# Altium PCB unrouted2.0.PcbDoc
Units mil, origin at the board's own origin, x right, y up, seen from the top; angles counter-clockwise.
Board outline 1135 x 2850 mil, 2 copper layers (Top Layer, Bottom Layer); 53 components, 49 nets, 265 pads, 19 vias.
Unrouted connection lines stored in the file: 60.
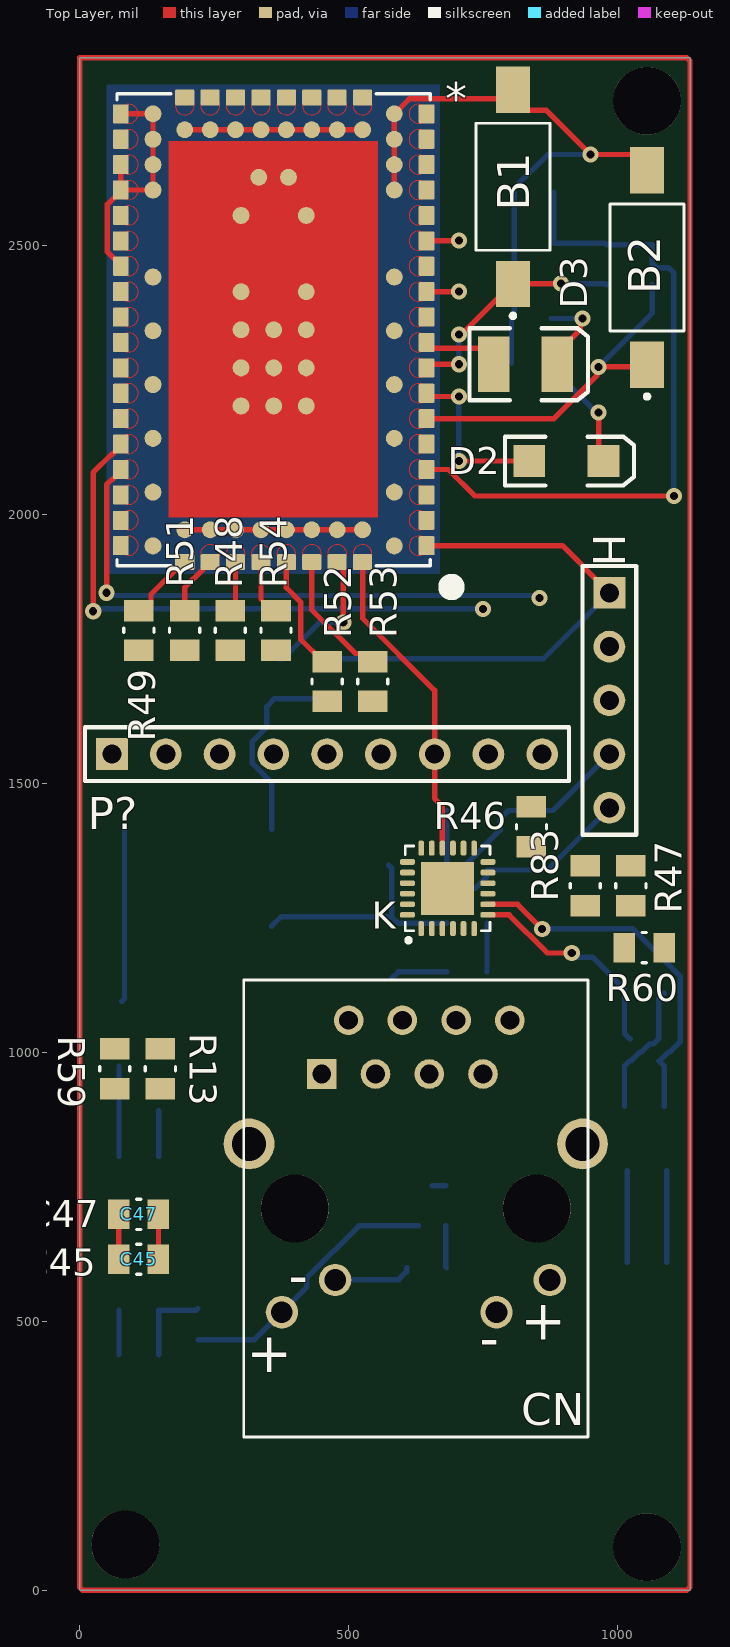
[diagram p0: Top Layer view]
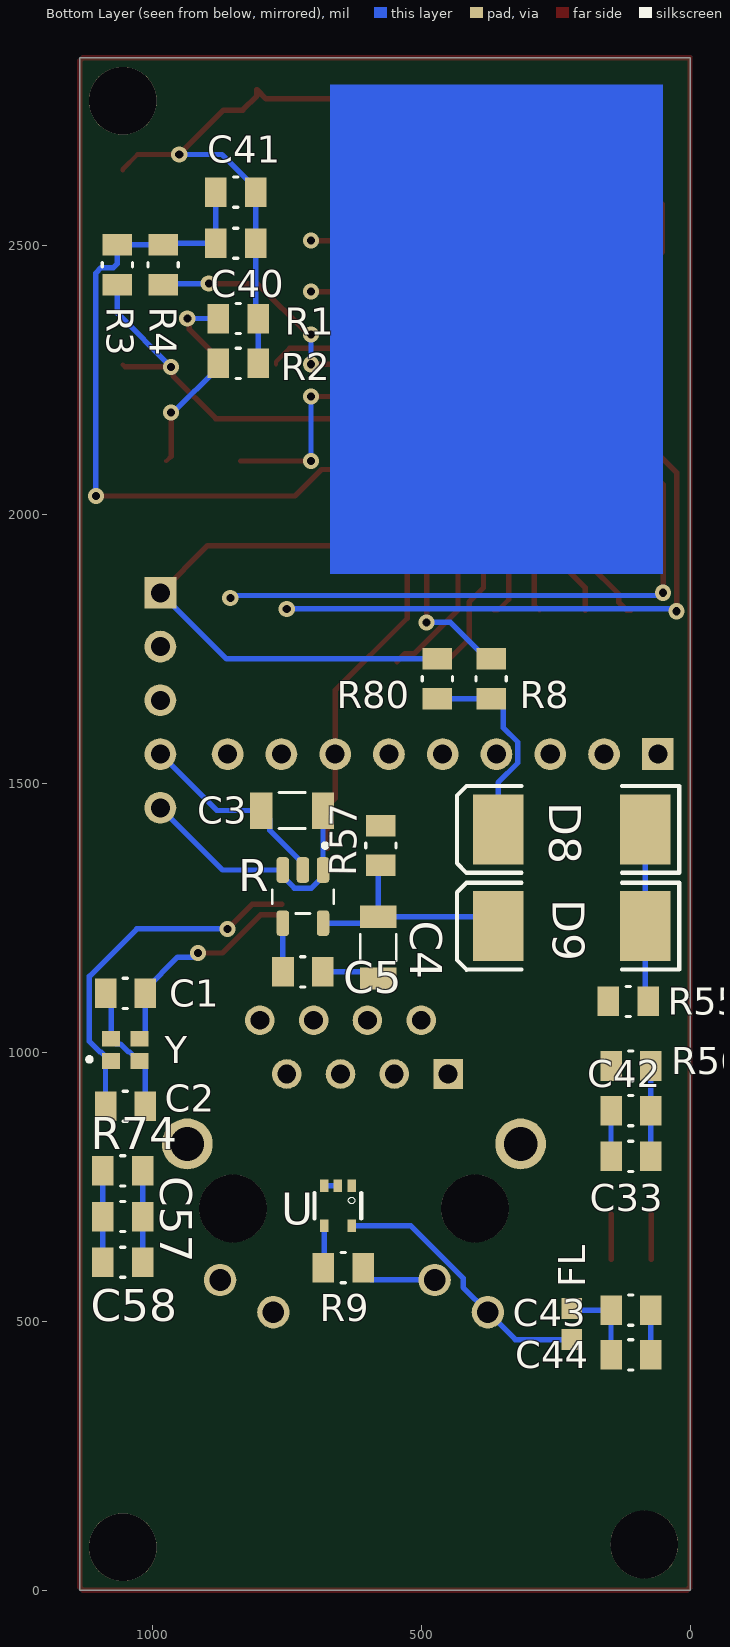
[diagram p1: Bottom Layer view, seen from below]

## Layer stack, top to bottom
Top Solder: solder mask 0.4, Solder Resist, Dk 3.5
Top Layer: signal copper 1.4
Dielectric 1: dielectric 12.6, FR-4, Dk 4.8
Bottom Layer: signal copper 1.4
Bottom Solder: solder mask 0.4, Solder Resist, Dk 3.5

## Board outline
0,2850 0,0 1135,0 1135,2850

## Design rules (kind name [scope] priority, off if disabled: settings)
Clearance [All] p1: gap=5 ignorepadtopadclearanceinfootprint=FALSE // Default=10mil
DiffPairsRouting [All] p1: maxlimit=10 minlimit=10 mostfreqgap=10 toplayer_minwidth=8 toplayer_maxwidth=15 toplayer_prefwidth=15 bottomlayer_minwidth=15 bottomlayer_maxwidth=15 bottomlayer_prefwidth=15 maxuncoupledlength=500 // DefaultMinWidth=15mil
HoleSize [All] p1: absolutevalues=TRUE maxlimit=150 minlimit=1 maxpercent=80.000 minpercent=20.000 // MaximumDefault=100mil
MinimumSolderMaskSliver [All] p1: minsoldermaskwidth=1 // Default=10mil
PolygonConnect [All] p1: connectstyle=Relief reliefconductorwidth=10 reliefentries=4 polygonreliefangle="90 Angle" airgapwidth=10
RoomDefinition Ublox_breakout [InComponentClass('Ublox_breakout')] p1: confinementstyle=ConfineIn formatcopy=TRUE lockcomponents=FALSE outline -163.49,0 2436.51,0 2436.51,2999.07 -163.49,2999.07
RoutingVias [All] p1: holewidth=28 width=50 viastyle="Through Hole" minholewidth=28 minwidth=50 maxholewidth=28 maxwidth=50
SilkToSolderMaskClearance [IsPad] p1: minsilkscreentomaskgap=4 clearancetoexposedcopper=TRUE // Default=10mil
SolderMaskExpansion [All] p1: expansion=4 istentingtop=FALSE
Width [All] p1: maxlimit=10 minlimit=5 preferedwidth=10 toplayer_prefwidth=8 minimp=50.000000 maximp=50.000000 favimp=50.000000 // MinWidthDefault=10mil
26 further rules are at their usual default settings.

## Classes and differential pairs
differential pair PHY_TX: +PHY_TX_P -PHY_TX_N
differential pair PHY_RX: +PHY_RX_P -PHY_RX_N

## Components (designator, comment, footprint, x,y, rotation, side; value= is the part's Value field where it differs from the comment)
* "ODIN-W262" ODIN-W262 360.63,2344.13 r90 top
B1 "push button" TECO-FSMSM 805.68,2610 r90 top
B2 "push button" TECO-FSMSM 1055,2460 r90 top
C1 "22uF 10V" 0805 1050,1110 r0 bottom value=22uF
C2 "22uF 10V" 0805 1050,900 r180 bottom value=22uF
C3 "10UF 25V" 1206 740,1450 r0 bottom value=10uF
C4 "10UF 25V" 1206 580,1195 r270 bottom value=10uF
C5 "10nF 50V" 0805 720,1150 r180 bottom value=10nF
C33 "2.2uF 16V" 0805 110,807 r0 bottom value=2.2uF
C40 "100nF 50V" 0805 845,2505 r0 bottom value=100nF
C41 "100nF 50V" 0805 845,2600 r0 bottom value=100nF
C42 "100nF 50V" 0805 110,892 r0 bottom value=100nF
C43 "2.2uF 16V" 0805 110,521.03 r0 bottom value=2.2uF
C44 "100nF 50V" 0805 110,437.75 r0 bottom value=100nF
C45 "100nF 50V" 0805 109.38,615.67 r0 top value=100nF
C47 "100nF 50V" 0805 109.38,698.95 r0 top value=100nF
C57 "100nF 50V" 0805 1055,695 r0 bottom value=100nF
C58 "100nF 50V" 0805 1055,610 r0 bottom value=100nF
CN "CN J00-0045NL" "RJ45 J00-0045NL" 625,710 r180 top
D2 "LED2" 3.2X1.6X1.1 905,2100 r0 top
D3 "LED3" 3.5X2.8X1.9 829.06,2280 r0 top
D8 "Diode" SMC 220,1415 r0 bottom
D9 "Diode" SMC 220,1235 r0 bottom
FL "BLM18PG300SN1D" BEADC1608X95N 220,495 r90 bottom
H "Header 5" HDR1X5 985,1855 r270 top
K "KSZ8081RNAIA-TR" QFN50P400X400X90-25N 684.21,1305.2 r90 top
P? "Header 9" HDR1X9 60,1555 r0 top
R "LP2992IM5-1.8" SOT95P280X145-5N 720,1290 r270 bottom
R1 "270" 0805 840,2365 r0 bottom
R2 "270" 0805 840,2281.72 r0 bottom
R3 "1k" 0805 1065,2465 r90 bottom
R4 "1k" 0805 980,2465 r90 bottom
R8 "JUMPER" 0805 370,1695 r90 bottom value=0
R9 "120" 0805 645,600 r0 bottom
R13 "1k" 0805 150,970 r90 top
R46 "10.0" 0805 840,1420 r90 top
R47 "10.0" 0805 1025,1310 r90 top
R48 "10.0" 0805 280,1785 r270 top
R49 "10.0" 0805 110,1785 r270 top
R51 "10.0" 0805 195,1785 r270 top
R52 "10.0" 0805 460,1690 r90 top
R53 "10.0" 0805 545,1690 r90 top
R54 "10.0" 0805 365,1785 r90 top
R55 "1k" 0805 115,1095 r0 bottom
R56 "1k" 0805 110,975 r180 bottom
R57 "1k" 0805 575,1385 r90 bottom
R59 "1k" 0805 65,970 r270 top
R60 "6.8k" 0805 1050,1195 r180 top
R74 "16m" 0805 1055,780 r180 bottom
R80 "JUMPER" 0805 470,1695 r90 bottom value=0
R83 "4.7k" 0805 940,1310 r270 top
U "NC7SZ125" SC70-5 655,715 r0 bottom
Y "ECS-250-10-37-JTN-TR" XTAL_ECS-250-10-37-JTN-TR 1050,1005 r180 bottom

## Footprints (in the part's own frame and the unit in brackets; to place one, negate y for a bottom-side part, rotate by r counter-clockwise, add the part's x,y. Pads: shape width x height; smd on the part's side, far side on the other; paste and mask are expansions set on the pad)
3.2X1.6X1.1 [mm]
  rect 1.5x1.5 smd: 1(-1.75,0) 2(1.75,0)
  silkscreen extent -2.9,-1.15 3.2,1.15
3.5X2.8X1.9 [mm] "SM LED; 2 C-Bend Leads; Body 3.5 x 2.8 x 1.9 mm, inc leads (LxWxH typ)"
  rect 1.5x2.6 smd: 1(-1.5,0) 2(1.5,0)
  silkscreen extent -2.65,-1.7 2.95,1.7
0805 [mil]
  rect 40x55 smd: 1(-37,0) 2(37,0)
  silkscreen extent -4,-28 4,28
1206 [mm]
  rect 1.05x1.72 smd: 1(-1.46,0) 2(1.46,0)
  silkscreen extent -0.62,-0.85 0.62,0.85
BEADC1608X95N [mm]
  rect 1x0.97 smd: 1(-0.735,0) 2(0.735,0)
HDR1X5 [mm] "Connector; Header; 5 Position"
  rect 1.5x1.5 hole 0.9: 1(0,0)
  round 1.5 hole 0.9: 2(2.54,0) 3(5.08,0) 4(7.62,0) 5(10.16,0)
  silkscreen extent -1.27,-1.27 11.43,1.27
HDR1X9 [mm] "Connector; Header; 9 Position"
  rect 1.5x1.5 hole 0.9: 1(0,0)
  round 1.5 hole 0.9: 2(2.54,0) 3(5.08,0) 4(7.62,0) 5(10.16,0) 6(12.7,0) 7(15.24,0) 8(17.78,0) 9(20.32,0)
  silkscreen extent -1.27,-1.27 21.59,1.27
ODIN-W262 [mm]
  round 0.8 smd: 1(6.6,-5.7) 2(7.8,-5.7) 3(9,-5.7) 4(10.2,-5.7) 5(9.45,-4.2) 6(9.45,-3) 7(9.45,-1.8) 8(9.45,-0.6) 9(9.45,0.6) 10(9.45,1.8) 11(9.45,3) 12(9.45,4.2) 13(10.2,5.7) 14(9,5.7) 15(7.8,5.7) 16(6.6,5.7) 17(-9.45,4.2) 18(-9.45,3) 19(-9.45,1.8) 20(-9.45,0.6) 21(-9.45,-0.6) 22(-9.45,-1.8) 23(-9.45,-3) 24(-9.45,-4.2) 25(-3.6,-1.54) 26(-1.8,-1.54) 27(0,-1.54) 28(1.8,-1.54) 29(5.4,-1.54) 30(7.2,-0.7) 31(-3.6,0) 32(-1.8,0) 33(0,0) 34(-3.6,1.54) 35(-1.8,1.54) 36(0,1.54) 37(1.8,1.54) 38(5.4,1.54) 39(7.2,0.7) TP1(2.49,-5.7) TP2(2.49,5.7) TP3(-0.05,-5.7) TP4(-0.05,5.7) TP5(-2.59,-5.7) TP6(-2.59,5.7) TP7(-5.13,-5.7) TP8(-5.13,5.7) TP9(-7.67,-5.7) TP10(-7.67,5.7) TP11(-10.21,-5.7) TP12(-10.21,5.7)
  rrect15% 0.9x0.75 smd paste-1 mask+0: A1(-10.2,-7.225) A2(-9,-7.225) A3(-7.8,-7.225) A4(-6.6,-7.225) A5(-5.4,-7.225) A6(-4.2,-7.225) A7(-3,-7.225) A8(-1.8,-7.225) A9(-0.6,-7.225) A10(0.6,-7.225) A11(1.8,-7.225) A12(3,-7.225) A13(4.2,-7.225) A14(5.4,-7.225) A15(6.6,-7.225) A16(7.8,-7.225) A17(9,-7.225) A18(10.2,-7.225) C1(10.2,7.225) C2(9,7.225) C3(7.8,7.225) C4(6.6,7.225) C5(5.4,7.225) C6(4.2,7.225) C7(3,7.225) C8(1.8,7.225) C9(0.6,7.225) C10(-0.6,7.225) C11(-1.8,7.225) C12(-3,7.225) C13(-4.2,7.225) C14(-5.4,7.225) C15(-6.6,7.225) C16(-7.8,7.225) C17(-9,7.225) C18(-10.2,7.225)
  rrect15% 0.75x0.9 smd paste-1 mask+0: B1(10.975,-4.2) B2(10.975,-3) B3(10.975,-1.8) B4(10.975,-0.6) B5(10.975,0.6) B6(10.975,1.8) B7(10.975,3) B8(10.975,4.2) D1(-10.975,4.2) D2(-10.975,3) D3(-10.975,1.8) D4(-10.975,0.6) D5(-10.975,-0.6) D6(-10.975,-1.8) D7(-10.975,-3) D8(-10.975,-4.2)
  Top Layer circle w0: c10.2,6.85 r0.45
  Top Layer circle w0: c-6.6,-6.85 r0.45
  Top Layer circle w0: c10.6,4.2 r0.45
  Top Layer circle w0: c10.6,3 r0.45
  Top Layer circle w0: c10.6,1.8 r0.45
  Top Layer circle w0: c10.6,0.6 r0.45
  Top Layer circle w0: c10.6,-0.6 r0.45
  Top Layer circle w0: c10.6,-1.8 r0.45
  Top Layer circle w0: c10.6,-3 r0.45
  Top Layer circle w0: c10.6,-4.2 r0.45
  Top Layer circle w0: c4.2,6.85 r0.45
  Top Layer circle w0: c5.4,6.85 r0.45
  Top Layer circle w0: c9,6.85 r0.45
  Top Layer circle w0: c-10.2,6.85 r0.45
  Top Layer circle w0: c-9,6.85 r0.45
  Top Layer circle w0: c-7.8,6.85 r0.45
  Top Layer circle w0: c-4.2,6.85 r0.45
  Top Layer circle w0: c-3,6.85 r0.45
  Top Layer circle w0: c-1.8,6.85 r0.45
  Top Layer circle w0: c-0.6,6.85 r0.45
  Top Layer circle w0: c0.6,6.85 r0.45
  Top Layer circle w0: c1.8,6.85 r0.45
  Top Layer circle w0: c-5.4,-6.85 r0.45
  Top Layer circle w0: c-9,-6.85 r0.45
  Top Layer circle w0: c10.2,-6.85 r0.45
  Top Layer circle w0: c9,-6.85 r0.45
  Top Layer circle w0: c7.8,-6.85 r0.45
  Top Layer circle w0: c6.6,-6.85 r0.45
  Top Layer circle w0: c5.4,-6.85 r0.45
  Top Layer circle w0: c3,-6.85 r0.45
  Top Layer lines w0: -5.414,7.3 ccw(c-5.4,6.85) -5.486,7.292 ccw(c-5.4,6.85) -5.531,7.281 ccw(c-5.4,6.85) -5.667,6.488 ccw(c-5.4,6.85) -5.4,6.4 ccw(c-5.4,6.85) -5.414,7.3 ; 2.968,7.299 cw(c3,6.85) 3.07,7.295 cw(c3,6.85) 3.131,7.281 cw(c3,6.85) 3,6.4 cw(c3,6.85) 2.968,7.299 ; 6.53,7.295 cw(c6.6,6.85) 6.849,7.225 cw(c6.6,6.85) 6.6,6.4 cw(c6.6,6.85) 6.49,7.286 cw(c6.6,6.85) 6.53,7.295 ; -6.731,7.281 cw(c-6.6,6.85) -6.6,6.4 cw(c-6.6,6.85) -6.731,7.281 ; 7.669,7.281 ccw(c7.8,6.85) 7.551,7.225 ccw(c7.8,6.85) 7.8,6.4 ccw(c7.8,6.85) 7.669,7.281 ; -11.031,4.331 cw(c-10.6,4.2) -10.6,3.75 cw(c-10.6,4.2) -11.045,4.13 cw(c-10.6,4.2) -11.05,4.2 cw(c-10.6,4.2) -11.05,4.207 cw(c-10.6,4.2) -11.047,4.251 cw(c-10.6,4.2) -11.042,4.286 cw(c-10.6,4.2) -11.031,4.331 ; -11.031,3.131 cw(c-10.6,3) -10.6,2.55 cw(c-10.6,3) -11.05,3 cw(c-10.6,3) -11.045,3.07 cw(c-10.6,3) -11.031,3.131 ; -11.05,1.8 cw(c-10.6,1.8) -10.6,1.35 cw(c-10.6,1.8) -11.05,1.8 ; -11.047,0.651 ccw(c-10.6,0.6) -11.05,0.6 ccw(c-10.6,0.6) -10.6,0.15 ccw(c-10.6,0.6) -11.047,0.651 ; -11.05,-0.6 cw(c-10.6,-0.6) -10.6,-1.05 cw(c-10.6,-0.6) -11.05,-0.619 cw(c-10.6,-0.6) -11.05,-0.6 ; -11.048,-1.762 ccw(c-10.6,-1.8) -11.05,-1.8 ccw(c-10.6,-1.8) -11.035,-1.917 ccw(c-10.6,-1.8) -11.031,-1.931 ccw(c-10.6,-1.8) -10.6,-2.25 ccw(c-10.6,-1.8) -11.048,-1.762 ; -11.031,-2.869 ccw(c-10.6,-3) -11.05,-3 ccw(c-10.6,-3) -11.049,-3.032 ccw(c-10.6,-3) -11.043,-3.08 ccw(c-10.6,-3) -11.042,-3.086 ccw(c-10.6,-3) -11.034,-3.118 ccw(c-10.6,-3) -11.031,-3.131 ccw(c-10.6,-3) -10.6,-3.45 ccw(c-10.6,-3) -11.031,-2.869 ; -11.05,-4.2 cw(c-10.6,-4.2) -10.6,-4.65 cw(c-10.6,-4.2) -10.975,-4.449 cw(c-10.6,-4.2) -11.031,-4.331 cw(c-10.6,-4.2) -11.05,-4.2 ; 0.6,-6.4 cw(c0.6,-6.85) 0.6,-7.3 cw(c0.6,-6.85) 0.6,-6.4 ; -8.067,-6.488 ccw(c-7.8,-6.85) -8.098,-6.513 ccw(c-7.8,-6.85) -7.8,-7.3 ccw(c-7.8,-6.85) -8.067,-6.488 ; -10.069,-7.281 ccw(c-10.2,-6.85) -10.27,-7.295 ccw(c-10.2,-6.85) -10.2,-7.3 ccw(c-10.2,-6.85) -10.114,-7.292 ccw(c-10.2,-6.85) -10.069,-7.281 ; -3.131,-7.281 ccw(c-3,-6.85) -3.07,-7.295 ccw(c-3,-6.85) -3,-7.3 ccw(c-3,-6.85) -3.131,-7.281 ; -0.514,-7.292 cw(c-0.6,-6.85) -0.6,-7.3 cw(c-0.6,-6.85) -0.67,-7.295 cw(c-0.6,-6.85) -0.514,-7.292 ; -1.87,-7.295 cw(c-1.8,-6.85) -1.73,-7.295 cw(c-1.8,-6.85) -1.8,-7.3 cw(c-1.8,-6.85) -1.87,-7.295 ; 1.87,-7.295 ccw(c1.8,-6.85) 1.8,-7.3 ccw(c1.8,-6.85) 1.849,-7.297 ccw(c1.8,-6.85) 1.87,-7.295 ; -4.169,-7.299 cw(c-4.2,-6.85) -4.2,-7.3 cw(c-4.2,-6.85) -4.169,-7.299 ; 4.213,-7.3 ccw(c4.2,-6.85) 4.2,-7.3 ccw(c4.2,-6.85) 4.213,-7.3
  silkscreen extent -12.4,-8.65 11.15,7.4, body extent -11.15,-7.4 11.15,7.4, height 4.8
QFN50P400X400X90-25N [mm]
  rrect70% 0.71x0.27 smd: 1(-1.9,1.25) 2(-1.9,0.75) 3(-1.9,0.25) 4(-1.9,-0.25) 5(-1.9,-0.75) 6(-1.9,-1.25) 13(1.9,-1.25) 14(1.9,-0.75) 15(1.9,-0.25) 16(1.9,0.25) 17(1.9,0.75) 18(1.9,1.25)
  rrect70% 0.27x0.71 smd: 7(-1.25,-1.9) 8(-0.75,-1.9) 9(-0.25,-1.9) 10(0.25,-1.9) 11(0.75,-1.9) 12(1.25,-1.9) 19(1.25,1.9) 20(0.75,1.9) 21(0.25,1.9) 22(-0.25,1.9) 23(-0.75,1.9) 24(-1.25,1.9)
  rect 2.5x2.5 smd paste-2: 25(0,0)
  silkscreen extent -2.55,-2 2,2
"RJ45 J00-0045NL" [mm]
  rect 1.398x1.398 hole 0.89: 1(4.445,-6.35)
  round 1.398 hole 0.89: 2(3.175,-8.89) 3(1.905,-6.35) 4(0.635,-8.89) 5(-0.635,-6.35) 6(-1.905,-8.89) 7(-3.175,-6.35) 8(-4.445,-8.89)
  round 1.53 hole 1.02: 9(6.325,4.9) 10(3.81,3.38) 11(-3.81,4.9) 12(-6.325,3.38)
  round 3.2 hole 3.2 unplated: None(-5.715,0) None(5.715,0)
  round 2.4 hole 1.6: S1(-7.875,-3.05) S2(7.875,-3.05)
  silkscreen extent -8.13,-10.8 8.13,10.8
SC70-5 [mm]
  rect 0.4x0.6 smd: 1(-0.65,-0.95) 2(0,-0.95) 3(0.65,-0.95) 4(0.65,0.95) 5(-0.65,0.95)
  silkscreen extent -1.1,-0.6 1.1,0.6
SMC [mm] "DO-214-AB/SMC; 2 C-Bend Leads; Body 7.9 x 5.9 mm, inc. leads (LxW)"
  rect 2.4x3.3 smd: 1(-3.475,0) 2(3.475,0)
  silkscreen extent -5.07,-2.05 5.43,2.05
SOT95P280X145-5N [mm]
  rrect50% 1.21x0.59 smd: 1(-1.255,0.95) 2(-1.255,0) 3(-1.255,-0.95) 4(1.255,-0.95) 5(1.255,0.95)
  silkscreen extent -2.51,-1.45 0.8,1.45
TECO-FSMSM [mm]
  rect 2.19x1.6 smd: 1(-4.59,0) 2(4.59,0)
  silkscreen extent -6.2,-1.75 3,1.75
XTAL_ECS-250-10-37-JTN-TR [mm]
  rect 0.85x0.75 smd: 1(-0.675,-0.525) 2(0.675,-0.525) 3(0.675,0.525) 4(-0.675,0.525)
  silkscreen extent -1.8,-0.55 -1.6,-0.35

## Part data
B1 B2: library part Teco-FSMSM
C1 C2: library part "CAP 22uF 10V", "CAP CER 2.2UF 10V X5R 0805", Operating Temperature="-55°C ~ 85°C", Package=0805, Rating=10V, Temperature Coefficient=X5R, Tolerance=20%
C3 C4: library part "CAP 10uF 25V", "CAP CER 10UF 25V X5R 1206", Operating Temperature="-55°C ~ 85°C", Package=1206, Rating=25V, Temperature Coefficient=X5R, Tolerance=10%
C5: library part "CAP 10nF 50V", "CAP CER 10000PF 50V X7R 0805", Operating Temperature="-55°C ~ 125°C", Package=0805, Rating=50V, Temperature Coefficient=X7R, Tolerance=10%
C33 C43: library part "CAP 2.2uF 16V", "CAP CER 2.2UF 16V X7R 0805", Operating Temperature="-55°C ~ 125°C", Package=0805, Rating=16V, Temperature Coefficient=X7R, Tolerance=10%
C40 C41 C42 C44 C45 C47 C57 C58: library part "CAP 100nF 50V", "CAP CER 0.1UF 50V X7R 0805", Package=0805, Rating=50V, Tolerance=10%
CN: library part "CN MAGJACK", "CN MAGJACK 1PORT 100 BASE-TX", Package=None, Supplier Part Number 1=673-J00-0045NL, Digikey=553-1619-5-ND, Digikey Link=https://www.digikey.com/product-detail/en/pulse-electronics-network/J00-0045NL/553-1619-5-ND/1036860?utm_source=snapeda&utm_medium=aggregator&utm_campaign=symbol, MF="Pulse Electronics", MP=J00-0045NL, SnapEDA_Link=https://www.snapeda.com/parts/J00-0045NL/Pulse%20Electronics%20Network/view-part/87956/?ref=snap, Supplier 1=Mouser
D2: library part "LED RED SMD", "Typical RED, GREEN, YELLOW, AMBER GaAs LED", Color=Red, Current - Test=20mA, Lens Color=Colorless, Package=1206, Voltage - Forward (Vf) (Typ)=1.7V, Lens Transparency=Clear
D3: "Typical BLUE SiC LED", DatasheetVersion=16-Apr-2002, LatestRevisionDate=17-Dec-2003, LatestRevisionNote="PCB Footprint replaced.", PackageDescription="SM LED; 2 C-Bend Leads; Body 3.5 x 2.8 x 1.9 mm, inc leads (LxWxH typ)", PackageReference=3.5X2.8X1.9, PackageVersion=16-Apr-2002, Published=8-Jun-2000, Publisher="Altium Limited"
D8 D9: "Default Diode", Code_JEDEC=DO-214-AB, LatestRevisionDate=17-Jul-2002, LatestRevisionNote="Re-released for DXP Platform.", PackageDescription="DO-214-AB/SMC; 2 C-Bend Leads; Body 7.9 x 5.9 mm, inc. leads (LxW)", PackageReference=SMC, PackageVersion=Sep-1996, Published=8-Jun-2000, Publisher="Altium Limited"
FL: "30 Ohms @ 100MHz 1 Power Line Ferrite Bead 0603 _1608 Metric_ 1A 50mOhm", Package="1608 Murata", Availability=Unavailable, MF=Murata, MP=BLM18PG300SN1D, Price=None, SnapEDA_Link=https://www.snapeda.com/parts/BLM18PG300SN1D/Murata/view-part/270173/?ref=snap
H: "Header, 5-Pin", LatestRevisionDate=17-Jul-2002, LatestRevisionNote="Re-released for DXP Platform.", Publisher="Altium Limited"
K: "1/1 Transceiver Full RMII 24-QFN _4x4_", Package="QFN-24 Microchip", Availability=Unavailable, MF=Microchip, MP=KSZ8081RNAIA-TR, Price=None, SnapEDA_Link=https://www.snapeda.com/parts/KSZ8081RNAIA-TR/Microchip/view-part/482545/?ref=snap
P?: "Header, 9-Pin", LatestRevisionDate=17-Jul-2002, LatestRevisionNote="Re-released for DXP Platform.", Publisher="Altium Limited"
R: Package=None, Availability=Unavailable, MP=LP2992IM5-1.8/NOPB, Price=None
R1 R2: library part "RES 270 1/8W", "RES SMD 270 OHM 5% 1/8W 0805", Package=0805, Power (Watts)=0.125W, Tolerance=5%
R3 R4 R13 R55 R56 R57 R59: library part "RES 1k 1/8W", "RES SMD 1K OHM 5% 1/8W 0805", Package=0805, Power (Watts)=0.125W, Tolerance=5%
R8 R80: library part "RES 0 JUMPER", "RES SMD 0 OHM JUMPER GENERIC 0805", Package=0805
R9: library part "RES 120.0 1/8W", "RES SMD 120 OHM 5% 1/8W 0805", Package=0805, Power (Watts)=0.125W, Tolerance=5%
R46 R47 R48 R49 R51 R52 R53 R54: library part "RES 10.0 1/8W - 5%", "RES SMD 10.0 OHM 5% 1/8W 0805", Package=0805, Power (Watts)=0.125W, Tolerance=5%
R60: library part "RES 6.8k 1/8W", "RES SMD 6.8K OHM 5% 1/8W 0805", Package=0805, Power (Watts)=0.125W, Tolerance=5%
R74: library part "RES 16m 1/2W", "RES SMD 0.016 OHM 1% 1/2W 0805 Thick Film", Case Code (Imperial)=0805, Case Code (Metric)=2012, Manufacturer=Panasonic, Manufacturer Part Number=ERJ-6BWFR016V, Max Operating Temperature=155°C, Max Power Dissipation=500mW, Min Operating Temperature=-55°C, Package Quantity=1, Resistance=16mR, Supplier Part Number 1=P.016AQCT-ND, Temperature Coefficient=200ppm/°C, Tolerance=1%, Case/Package=0805, Category="Chip SMD Resistors", ComponentLink1Description=https://datasheet.ciiva.com/11808/0900766b8126441d-11808690.pdf?src-supplier=RSComponents, ComponentLink1URL=https://datasheet.ciiva.com/11808/0900766b8126441d-11808690.pdf?src-supplier=RSComponents, ComponentLink2Description=https://datasheet.ciiva.com/2452/aoa0000ce3-2452594.pdf?src-supplier=Digi-Key, ComponentLink2URL=https://datasheet.ciiva.com/2452/aoa0000ce3-2452594.pdf?src-supplier=Digi-Key, ComponentLink3Description=https://datasheet.ciiva.com/2452/aoa0000ce3-2452592.pdf?src-supplier=Digi-Key, ComponentLink3URL=https://datasheet.ciiva.com/2452/aoa0000ce3-2452592.pdf?src-supplier=Digi-Key, ComponentLink4Description=https://datasheet.ciiva.com/2452/aoa0000ce3-2452593.pdf?src-supplier=Digi-Key, ComponentLink4URL=https://datasheet.ciiva.com/2452/aoa0000ce3-2452593.pdf?src-supplier=Digi-Key, ComponentLink5Description=https://datasheet.ciiva.com/9192/aoa0000ce3-9192761.pdf?src-supplier=Avnet, ComponentLink5URL=https://datasheet.ciiva.com/9192/aoa0000ce3-9192761.pdf?src-supplier=Avnet, ComponentLink6Description=https://datasheet.ciiva.com/17211/aoa0000ce3-17211370.pdf?src-supplier=Avnet+Europe, ComponentLink6URL=https://datasheet.ciiva.com/17211/aoa0000ce3-17211370.pdf?src-supplier=Avnet+Europe, Composition="Thick Film", Contact Plating=Tin, Depth=1.25mm, Features="Automotive AEC-Q200", Height=0.028inch, Lead Free="Lead Free", Length=2mm, Military Standard=Not, Mount="Surface Mount", Number of Pins=2, Number of Terminations=2, Packaging="Tape and Reel", Power Rating=500mW, Pricing 1="1=0.65000, 10=0.53800, 100=0.36140, 1000=0.21148, 2500=0.20917 (USD)", Radiation Hardening=No, RoHS=Yes, Stock 1=4585, Supplier 1=Digi-Key, Termination=SMD/SMT, Width=0.049inch
R83: library part "RES 4.7k 1/8W - 5%", "RES SMD 4.7k OHM 5% 1/8W 0805", Package=0805, Power (Watts)=0.125W, Tolerance=5%
U: "Buffer, Non-Inverting 1 Element 1 Bit per Element 3-State Output SC-70-5", Package="SC-70 ON Semiconductor", Availability=Unavailable, MF="ON Semiconductor", MP=NC7SZ125, Price=None, SnapEDA_Link=https://www.snapeda.com/parts/NC7SZ125/ON%20Semiconductor/view-part/2686816/?ref=snap
Y: "SMD Crystal 2.0 x 1.6 x 0.45 mm ceramic package", Package=None, Availability=Unavailable, MP=ECS-250-10-37-JTN-TR, Price=None

## Free pads (board coordinates)
  round 125.98 hole 125.98 unplated: 6(85,85) 6(1055,80) 6(1055,2770)

## Via types
v1: diameter 30, hole 15, Top Layer to Bottom Layer, 19 vias

## Nets (pads, with @x,y where several pads share a name; then routed paths per layer and width w, separated by ;. In a path a pad name is that pad's centre, name@x,y a point inside that pad or via, vN(x,y) a via of type N, cw(c..) or ccw(c..) an arc to the next point about the centre after c; other vN are vias at no path point)
1v8: C4.1 D9.2 R13.2 R55.2 R57.1 R59.1 R83.1 R.5 | length 435.5
  Bottom Layer w10: D9.2 374.29,1252.48 C4.1 ; R57.1 580,1343 C4.1 ; R.5 591.89,1240.59 C4.1
3v3: *.A4 C3.1 C40.2 C41.2 CN.4 CN.5 CN.9 FL.1 H.5 R3.2 R4.2 R.1 R.3 U.5 | length 2267
  Top Layer w10: *.A4 648.03,2084.29 685.35,2084.29 734.64,2035 v1(1105,2035)
  Bottom Layer w10: FL.1 324.96,466.06 CN.9 421.99,563.09 421.99,580.65 518.93,677.6 U.5 ; C3.1 682.6,1449.92 R.1 682.6,1327.2 704.21,1305.59 735.79,1305.59 757.4,1327.2 R.3 869.41,1339.41 H.5 ; C41.2 C40.2 977,2505 R4.2 R3.2 1065,2467 1072.43,2459.57 1095.07,2459.57 1105,2449.64 v1(1105,2035)
BlueLED: *.A9 D3.1 | length 143.4
  Top Layer w8: *.A9 647.71,2320.51 647.82,2320.51 *.A9@648.03,2320.51 ; *.A9@647.82,2317.77 *.A9@655.59,2310 ; D3.1@744.47,2310 770,2284.47 D3.1
  Top Layer w10: *.A9@655.59,2310 D3.1@744.47,2310
BYPASS: C5.1 R.4 | length 90.8
  Bottom Layer w10: C5.1 757.4,1150.4 R.4
CRS_DV: K.15 R54.1
Diode_2: D2.2 R2.2 | length 224.1
  Top Layer w8: D2.2@965,2108.9 D2.2
  Top Layer w10: D2.2@965,2108.9 v1(965,2190)
  Bottom Layer w10: R2.2 877,2274.22 961.22,2190 v1(965,2190)
Diode_3: D3.2 R1.2 | length 162.4
  Top Layer w10: D3.2 888.11,2301.65 931.17,2344.72 931.17,2361.17 v1(935,2365)
  Bottom Layer w10: R1.2 v1(935,2365)
ETH_CRSDV: *.D4 P?.4 R54.2 R57.2 | length 106
  Top Layer w8: 337.01,1842.49 357.5,1822 R54.2 ; *.D4@337.01,1909.09 *.D4
  Top Layer w10: 337.01,1842.49 *.D4@337.01,1909.09
ETH_MC: K.10 P?.9 R47.1 R83.2
ETH_MDIO: K.11 P?.8
ETH_REFCLK: *.D8 K.16 P?.7 | length 593.5
  Top Layer w10: *.D8 525.98,1909.09 525.98,1807.66 660,1673.64 P?.7 660,1472.38 674.37,1458.01 K.16
ETH_RXD0: *.D5 P?.5 R52.2 | length 220.8
  Top Layer w10: *.D5 384.25,1909.09 384.25,1864.39 410.88,1837.77 410.88,1768.62 452.5,1727 R52.2
ETH_RXD1: *.D6 P?.6 R53.2 | length 242.2
  Top Layer w10: *.D6 431.5,1909.09 431.5,1823.15 512.64,1742 530,1742 R53.2
ETH_TXD0: *.D1 P?.1 R49.1 | length 131.5
  Top Layer w10: R49.1 117.5,1822 132.5,1837 132.5,1852.22 190.13,1909.86 192.32,1912.05 *.D1
ETH_TXD1: *.D2 P?.2 R51.1 | length 111.5
  Top Layer w10: R51.1 195,1864.53 229.8,1899.33 229.8,1902.28 237.38,1909.86 239.57,1912.05 *.D2
ETH_TXEN: *.D3 P?.3 R48.1 | length 94.1
  Top Layer w8: R48.1 R48.1@289.76,1831.76 ; *.D3@289.76,1909.09 *.D3
  Top Layer w10: R48.1@289.76,1831.76 *.D3@289.76,1909.09
GND: *.1 *.2 *.3 *.4 *.5 *.6 *.7 *.8 *.9 *.10 *.11 *.12 *.13 *.14 *.15 *.16 *.17 *.18 *.19 *.20 *.21 *.22 *.23 *.24 *.25 *.26 *.27 *.28 *.29 *.30 *.31 *.32 *.33 *.34 *.35 *.36 *.37 *.38 *.39 *.A3 *.A10 *.C1 *.C3 *.C4 *.C7 B1.2 B2.2 C1.2 C2.2 C3.2 C4.2 C5.2 C33.1 C40.1 C41.1 C42.1 C43.1 C44.1 C45.1 C47.1 C57.2 C58.2 H.4 K.22 K.25 R1.1 R2.1 R56.2 R60.1 R74.1 R.2 U.2 U.3 Y.2 Y.4 | length 3558.4
  Top Layer w8: B2.2@1027.5,2670 1055,2642.5 B2.2
  Top Layer w10: C45.1 C47.1 ; *.C4@73.77,2599.64 51.42,2577.29 51.42,2488.93 65.38,2474.96 66.42,2474.96 *.C7@73.99,2467.39 ; *.C4 108.66,2603.98 *.16 *.15 *.14 *.13 108.66,2745.71 *.C1 ; *.C4@76.18,2613.77 *.C3@76.18,2641.43 ; *.17 *.18 *.19 *.20 *.21 *.22 *.23 *.24 ; *.12 *.11 *.10 *.9 *.8 *.7 *.6 *.5 ; *.1 *.2 *.3 *.4 612.76,2773.43 788.4,2773.43 B1.2 805.68,2779.09 832.18,2752.6 867.4,2752.6 v1(950,2670) B2.2@1027.5,2670
  Bottom Layer w10: C44.1 C43.1 ; C33.1 C42.1 R56.2 ; C4.2 592.48,1150 C5.2 ; U.2 U.3 ; R.2 720,1351.61 781.81,1413.43 781.81,1434.33 C3.2 880,1450 H.4 ; R2.1 R1.1 808,2370 C40.1 C41.1 808,2607.5 870.5,2670 v1(950,2670) ; C2.2 1013,974.57 1022.76,984.33 Y.2 1025.39,984.33 1041.97,1000.91 1044.3,1000.91 1059.3,1015.91 1066.81,1015.91 Y.4 1076.57,1099.57 C1.2 ; C58.2 C57.2 R74.1
INTRP: K.18 R13.1
INV_TO_RJ45: CN.10 R9.1 | length 146.9
  Bottom Layer w10: CN.10 475.57,577.5 593,577.5 608,592.5 R9.1
JUMPERS: D8.2 R8.1 R80.1 | length 383
  Bottom Layer w10: D8.2 356.81,1502.29 320.47,1538.63 320.47,1577.3 347.5,1604.33 347.5,1643 362.5,1658 R8.1 R80.1
KSZ_RST_OUT: D8.1 D9.1 K.24 R55.1 | length 322.1
  Bottom Layer w10: R55.1 83.19,1100.19 D9.1 D8.1
MAIN_RESET: *.A1 H.1 R80.2 | length 942.1
  Top Layer w10: *.A1 648.03,1942.56 897.44,1942.56 H.1
  Bottom Layer w10: R80.2 862,1732 H.1
NetR9_2: R9.2 U.4 | length 78.2
  Bottom Layer w10: U.4 680.59,601.41 R9.2
PHY_LED0: K.23 R59.2 U.1
PHY_RX_N: CN.6 K.3
PHY_RX_P: CN.3 K.4
PHY_TX_N: CN.2 K.5
PHY_TX_P: CN.1 K.6
RedLED: *.A7 D2.1 | length 313.5
  Top Layer w8: *.A7 647.82,2223.28 *.A7@651.1,2220
  Top Layer w10: *.A7@651.1,2220 v1(705,2220) ; v1(705,2100) D2.1
  Bottom Layer w10: v1(705,2100) v1(705,2220)
REXT: K.9 R60.2
RJ_45_GND: C57.1 C58.1 CN.8 R74.2 | length 170
  Bottom Layer w10: C58.1 C57.1 R74.2
RMII_MDC: *.C15 R47.2 | length 1049.9
  Top Layer w10: v1(50,1855) 50,2056.19 58.57,2064.76 59.61,2064.76 73.99,2079.15 76.18,2081.34 *.C15
  Bottom Layer w10: v1(50,1855) 55,1850 850,1850 v1(855,1845)
RMII_MDIO: *.C14 R46.2 | length 1063.8
  Top Layer w8: v1@25,1816.37 v1(25,1820.68)
  Top Layer w10: v1(25,1820.68) 25,2078.44 58.57,2112.01 59.61,2112.01 73.99,2126.39 76.18,2128.58 *.C14
  Bottom Layer w10: v1(25,1820.68) 29.32,1825 v1(750,1825)
RST_D7: *.D7 R8.2 | length 265.2
  Top Layer w8: *.D7 479.24,1912.05 481.9,1909.38 *.D7@490,1901.28
  Top Layer w10: v1(490,1800) *.D7@490,1901.28
  Bottom Layer w10: R8.2 377.5,1732 445.5,1800 v1(490,1800)
RXD0: K.13 R52.1
RXD1: K.12 R53.1
RXER: K.17 R56.1
SWITCH0: *.A6 B2.1 R3.1 | length 653.6
  Top Layer w8: B2.1@1050.71,2275 B2.1
  Top Layer w10: *.A6 648.03,2178.78 881.74,2178.78 961.17,2258.21 961.17,2271.17 v1(965,2275) B2.1@1050.71,2275
  Bottom Layer w10: v1(965,2275) 1065,2375 R3.1
SWITCH1: *.A8 B1.1 R4.1 | length 433.5
  Top Layer w8: *.A8 647.82,2276.01 *.A8@651.81,2280 ; v1(705,2335) v1@709.97,2335 ; B1.1@804.97,2430 B1.1 B1.1@806.39,2430
  Top Layer w10: *.A8@651.81,2280 v1(705,2280) ; v1@709.97,2335 B1.1@804.97,2430 ; B1.1@806.39,2430 v1(895,2430)
  Bottom Layer w10: v1(705,2280) v1(705,2335) ; v1(895,2430) 978,2430 R4.1
TXD0: K.20 R49.2
TXD1: K.21 R51.2
TXEN: K.19 R48.2
UART_RXD: *.A13 H.2 | length 60.1
  Top Layer w8: *.A13 645.59,2510 *.A13@648.02,2510
  Top Layer w10: *.A13@648.02,2510 v1(705,2510)
UART_TXD: *.A11 H.3 | length 64.1
  Top Layer w8: *.A11 647.82,2417.74 650.08,2420 *.A11@655.08,2415
  Top Layer w10: *.A11@655.08,2415 v1(705,2415)
VDD_1v2: C45.2 C47.2 K.1 | length 83.3
  Top Layer w10: C45.2 C47.2
VDDA_3.3: C43.2 C44.2 FL.2 K.2 | length 157.5
  Bottom Layer w10: C44.2 C43.2 217.09,521.03 FL.2
VDDIO: C33.2 C42.2 K.14 | length 85
  Bottom Layer w10: C33.2 C42.2
X0: C1.1 K.7 Y.3 | length 408.7
  Top Layer w8: K.7 K.7@759.51,1255.49
  Top Layer w10: K.7 798.66,1255.98 869.64,1185 914.69,1185 v1@915,1185.31
  Bottom Layer w10: v1(915,1185) 922.65,1177.35 953.15,1177.35 1013,1117.5 C1.1 1013,1035.43 1022.76,1025.67 Y.3
X1: C2.1 K.8 Y.1 | length 678.4
  Top Layer w10: K.8 814.33,1275.67 v1(860,1230)
  Bottom Layer w10: v1(860,1230) 1028.64,1230 1117,1141.64 1117,1020.46 1097.45,1000.91 1095.12,1000.91 1078.54,984.33 Y.1@1077.24,984.33 ; Y.1 Y.1@1077.24,984.33 ; C2.1 1087,974.57 Y.1@1077.24,984.33
pads on no net: *.A2 *.A5 *.A12 *.A14 *.A15 *.A16 *.A17 *.A18 *.B1 *.B2 *.B3 *.B4 *.B5 *.B6 *.B7 *.B8 *.C2 *.C5 *.C6 *.C8 *.C9 *.C10 *.C11 *.C12 *.C13 *.C16 *.C17 *.C18 *.TP1 *.TP2 *.TP3 *.TP4 *.TP5 *.TP6 *.TP7 *.TP8 *.TP9 *.TP10 *.TP11 *.TP12 CN.7 CN.11 CN.12 CN.None CN.S1 CN.S2 R46.1
copper on no net: | length 7959.7
  Top Layer w10: 0,5.86 0,2850 1129.14,2850 1135,2844.14 1135,5.86 1129.14,0 5.86,0 0,5.86

## Other copper
Top Layer:
  rectangle net GND: 165,1995 555,2695
Bottom Layer:
  rectangle net GND: 50,1890 670,2800
  region: 50,1765
  region: 50,1765

## Text inside footprints (layer, text, board x,y; h text height)
CN: Top Overlay "+" at 905,530 h73.82 r180; Top Overlay "-" at 780.38,489.28 h73.82 r180; Top Overlay "-" at 425,605 h73.82 r180; Top Overlay "+" at 395,470 h73.82 r180; Mechanical 4 "12" at 930.23,654.79 h73.82 r180; Mechanical 4 "11" at 795.37,599.58 h73.82 r180; Mechanical 4 "10" at 514.61,664.65 h73.82 r180; Mechanical 4 "9" at 379.53,599.61 h73.82 r180; Mechanical 4 "FRONT" at 687.68,456.61 h73.82 r180; Mechanical 4 "RIGHT" at 913.46,331.05 h73.82 r180; Mechanical 4 "LEFT" at 424.12,330.64 h73.82 r180; Mechanical 4 "2" at 474.48,1045.98 h73.82 r180; Mechanical 4 "4" at 574.88,1045.6 h73.82 r180; Mechanical 4 "6" at 675.29,1046.72 h73.82 r180; Mechanical 4 "8" at 775.66,1046.28 h73.82 r180; Mechanical 4 "7" at 725.34,945.61 h73.82 r180; Mechanical 4 "5" at 625,946.03 h73.82 r180; Mechanical 4 "3" at 524.72,945.47 h73.82 r180; Mechanical 4 "1" at 424.03,945.93 h73.82 r180; Mechanical 4 "12" at 930.23,654.79 h73.82 r180; Mechanical 4 "11" at 795.37,599.58 h73.82 r180; Mechanical 4 "10" at 514.61,664.65 h73.82 r180; Mechanical 4 "9" at 379.53,599.61 h73.82 r180; Mechanical 4 "FRONT" at 687.68,456.61 h73.82 r180; Mechanical 4 "RIGHT" at 913.46,331.05 h73.82 r180; Mechanical 4 "LEFT" at 424.12,330.64 h73.82 r180; Mechanical 4 "2" at 474.48,1045.98 h73.82 r180; Mechanical 4 "4" at 574.88,1045.6 h73.82 r180; Mechanical 4 "6" at 675.29,1046.72 h73.82 r180; Mechanical 4 "8" at 775.66,1046.28 h73.82 r180; Mechanical 4 "7" at 725.34,945.61 h73.82 r180; Mechanical 4 "5" at 625,946.03 h73.82 r180; Mechanical 4 "3" at 524.72,945.47 h73.82 r180; Mechanical 4 "1" at 424.03,945.93 h73.82 r180